# Altium PCB 3_IIP_QuadUART.PcbDoc (part 2 of 2)
Units mm, origin at the board's own origin, x right, y up, seen from the top; angles counter-clockwise.
Board outline 82.5 x 28 mm, 2 copper layers (Top Layer, Bottom Layer), stack 1.571 mm thick; 58 components, 30 nets, 183 pads, 28 vias.
Unrouted connection lines stored in the file: 1.
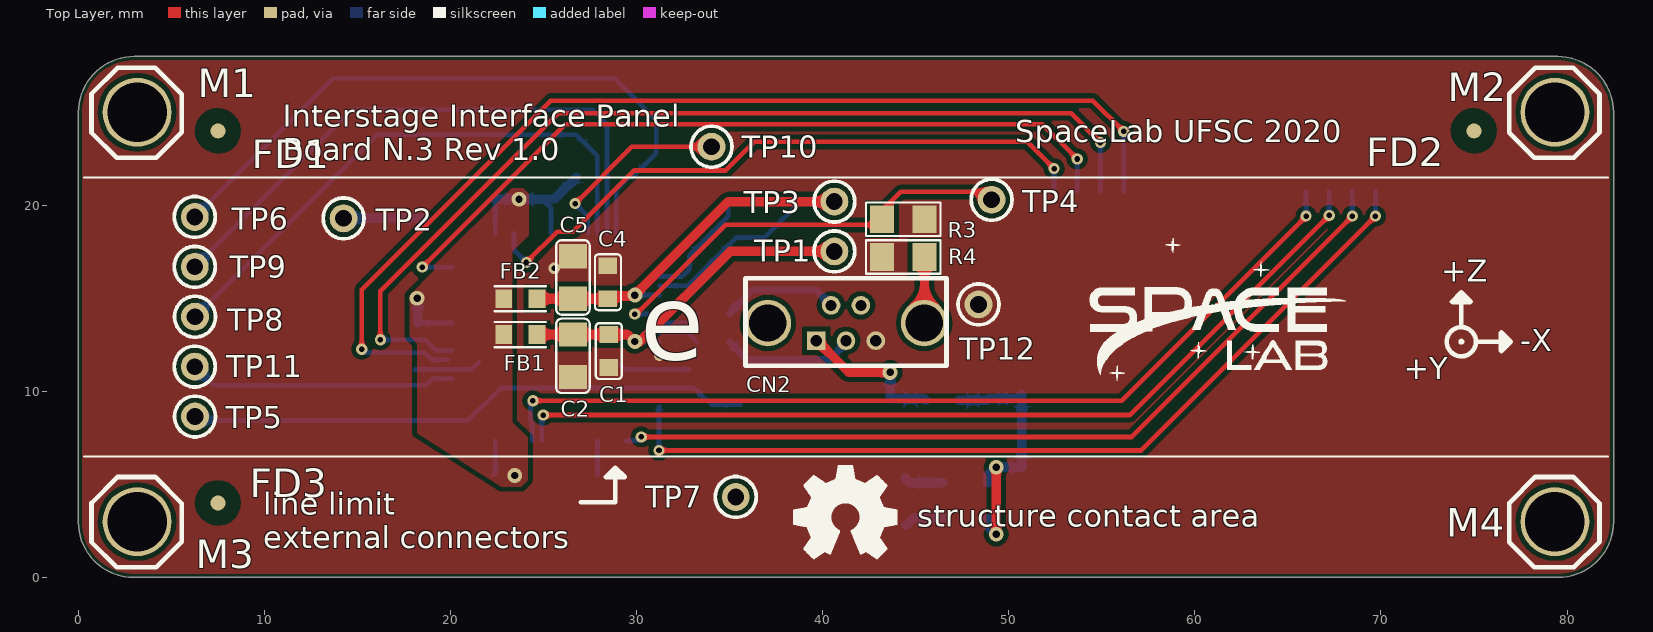
[diagram p0: Top Layer view]

## Polygon pours and split planes (outlines as drawn) (continued)
GND on Bottom Layer "Bottom_Layer-GND" (solid, remove dead copper, pour order 26): 0,25 cw(c3,25) 3,28 79.452,28 cw(c79.452,24.952) 82.5,24.952 82.5,3.048 cw(c79.452,3.048) 79.452,0 3.048,0 cw(c3.048,3.048) 0,3.048
3.3V on Top Layer "3.3V_TOP" (solid, pour order 6): 17.801,15.176 19.125,16.5 19.125,17.363 22.704,20.929 23.893,20.929 24.194,20.628 24.194,20.04 24.195,18.395 23.3,17.5 23.3,8.35 24.138,7.537 24.15,7.525 24.146,5.229 23.797,4.88 22.729,4.886 18.2,7.754 18.2,12.57 17.801,12.969
GND on Top Layer "Top_Layer-GND" (solid, remove dead copper, pour order 18): 0,25 cw(c3,25) 3,28 79.452,28 cw(c79.452,24.952) 82.5,24.952 82.5,3.048 cw(c79.452,3.048) 79.452,0 3.048,0 cw(c3.048,3.048) 0,3.048

## Silkscreen, mask and mechanical layers (free items; w line width, h text height)
Top Overlay:
  drawing of 1045 lines, arcs and shapes, not listed
  text "SpaceLab UFSC 2020" at 50.35,23.392 h1.2
  text "Interstage Interface Panel  / Board N.3 Rev 1.0" at 10.983,22.425 h1.2
  text "+Z" at 73.23,15.895 h1.2
  text "-X" at 77.48,12.145 h1.2
  text "+Y" at 71.23,10.645 h1.2
  text "e" at 30.2,10.35 h7
  text "structure contact area" at 45.071,2.724 h1.2
  text "line limit  / external connectors" at 9.925,1.575 h1.2
Bottom Overlay:
  circle w0.254: c74.325,12.65 r0.035
  circle w0.254: c74.325,12.65 r0.785
  region: 76.35,13.15 76.85,12.65 76.35,12.15
  region: 73.825,14.675 74.325,15.175 74.825,14.675
  lines w0.254: 73.825,14.8 74.325,15.3 ; 74.325,13.435 74.325,15.3 ; 74.825,14.8 74.325,15.3 ; 75.11,12.65 76.975,12.65 ; 76.475,12.15 76.975,12.65 ; 76.475,13.15 76.975,12.65
  text "Tx2" at 67.55,18.925 h0.8 r90
  text "GND" at 51.6,18.9 h0.8 r90
  text "Rx4" at 52.825,18.9 h0.8 r90
  text "Tx4" at 54.1,18.9 h0.8 r90
  text "Rx3" at 55.4,18.9 h0.8 r90
  text "Tx3" at 56.675,18.9 h0.8 r90
  text "Tx1" at 70.125,18.9 h0.8 r90
  text "Rx2" at 66.275,18.85 h0.8 r90
  text "Rx1" at 68.85,18.85 h0.8 r90
  text "GND" at 65,18.825 h0.8 r90
  text "UART  / Board / N.2" at 47.789,16.1 h0.8
  text "UART  / Board / N.1" at 62.2,16.1 h0.8
  text "+Z" at 73.235,15.875 h1.2
  text "-X" at 77.485,12.125 h1.2
  text "-Y" at 71.235,10.625 h1.2
  text "SpaceLab UFSC 2020" at 73.65,2.225 h1.2
Board edge:
  lines w0.2: 0,2.962 ccw(c2.962,2.962) 2.962,0 79.515,0 ccw(c79.515,2.985) 82.5,2.985 82.5,24.998 ccw(c79.498,24.998) 79.498,28 3.225,28 2.995,28 ccw(c2.995,25.005) 0,25.005 0,23.5 0,6.5 0,2.962
Dimensions:
  circle w0.2: c3.15,3 r1.6
  circle w0.2: c3.15,25 r1.6
  circle w0.2: c79.35,25 r1.6
  circle w0.2: c79.35,3 r1.6
  region: 39.664,5.221 40.164,5.721 40.664,5.221
  lines w0.2: 0.314,6.484 82.214,6.484 ; 0.314,21.484 82.214,21.484
  lines w0.254: 38.299,3.981 40.164,3.981 40.164,5.846 ; 39.664,5.346 40.164,5.846 ; 40.664,5.346 40.164,5.846
  text "structure contact area" at 26.389,23.534 h1.2
  text "external connectors area" at 25.139,13.334 h1.2
  text "(cm)" at 15.725,3.375 h1
  text "structure contact area" at 45.086,2.708 h1.2
  text "line limit  / external connectors" at 21.364,1.409 h1.2
Bottom ASM:
  text "R1" at 35.425,13.975 h0.5
  text "R2" at 35.399,12.426 h0.5
Sheet:
  lines w0.254: 0.427,-25.273 0.427,-5.161 138.649,-5.161 ; 0.502,-20.771 87.777,-20.771 ; 0.502,-16.009 138.649,-16.009 ; 0.552,-11.246 138.542,-11.246 ; 41.812,-25.198 41.812,-11.246 ; 87.849,-25.173 87.849,-5.211 ; 87.902,-11.161 87.902,-5.161 ; 105.374,-11.146 105.374,-5.148 ; 138.727,-25.273 -25.273,-25.273 -25.273,90.564 138.727,90.564 138.727,-25.183
  lines w0.381: -3.952,37.254 6.459,37.254 30.075,37.254 51.913,37.254 68.419,37.254 82.893,37.254 ; -3.952,40.302 6.459,40.302 30.075,40.302 51.913,40.302 68.419,40.302 82.893,40.302 ; -3.952,43.35 6.459,43.35 30.075,43.35 51.913,43.35 68.419,43.35 82.893,43.35 ; -3.952,46.398 6.459,46.398 30.075,46.398 51.913,46.398 68.419,46.398 82.893,46.398 ; -3.952,49.446 6.459,49.446 30.075,49.446 51.913,49.446 68.419,49.446 82.893,49.446 ; -3.952,52.494 6.459,52.494 30.075,52.494 51.913,52.494 68.419,52.494 82.893,52.494 ; -3.952,55.542 82.893,55.542 ; 6.459,58.59 6.459,34.206 ; 30.075,58.59 30.075,34.206 ; 51.913,58.59 51.913,34.206 ; 68.419,58.59 68.419,34.206 ; 6.459,34.206 -3.952,34.206 -3.952,58.59 82.893,58.59 82.893,34.206 68.419,34.206 ; 6.459,34.206 30.075,34.206 ; 30.075,34.206 51.913,34.206 ; 51.913,34.206 68.419,34.206
  text "Layer" at -2.174,56.304 h1.52
  text "Name" at 8.237,56.304 h1.52
  text "Material" at 31.853,56.304 h1.52
  text "Thickness" at 53.691,56.304 h1.52
  text "Constant" at 70.197,56.304 h1.52
  text "Top Overlay" at 8.237,53.256 h1.52
  text "Top Solder" at 8.237,50.208 h1.52
  text "Solder Resist" at 31.853,50.208 h1.52
  text "0,40mil" at 53.691,50.208 h1.52
  text "3,8" at 70.197,50.208 h1.52
  text "1" at -2.174,47.16 h1.52
  text "Top Layer" at 8.237,47.16 h1.52
  text "Copper" at 31.853,47.16 h1.52
  text "1,40mil" at 53.691,47.16 h1.52
  text "Dielectric 1" at 8.237,44.112 h1.52
  text "FR-4" at 31.853,44.112 h1.52
  text "59,06mil" at 53.691,44.112 h1.52
  text "4,5" at 70.197,44.112 h1.52
  text "2" at -2.174,41.064 h1.52
  text "Bottom Layer" at 8.237,41.064 h1.52
  text "Copper" at 31.853,41.064 h1.52
  text "1,40mil" at 53.691,41.064 h1.52
  text "Bottom Solder" at 8.237,38.016 h1.52
  text "Solder Resist" at 31.853,38.016 h1.52
  text "0,40mil" at 53.691,38.016 h1.52
  text "3,8" at 70.197,38.016 h1.52
  text "Bottom Overlay" at 8.237,34.968 h1.52
  text "DATE:" at 107.527,-9.248 h1.92
  text "1.0" at 99.302,-9.323 h1.92
  text "15/07/2020" at 118.252,-9.323 h1.92
  text "REV:" at 90.052,-9.561 h2.41
  text "TITLE: SEMI USB N.3 BOARD" at 2.527,-9.736 h2.54
  text "Silkscreen color: white" at 43.052,-14.498 h1.92
  text "MATERIAL:" at 2.367,-14.646 h1.92
  text "FR4" at 19.194,-14.646 h1.92
  text "Project: IIP FloripaSat-2" at 89.827,-14.673 h1.92
  text "Space Technology Research Laboraty" at 89.002,-18.273 h1.45
  text "Board Thickness:" at 2.042,-19.409 h1.92
  text "Layers: 02" at 43.252,-19.423 h1.92
  text "1.6mm" at 31.927,-19.498 h1.92
  text "Federal University of Santa Catarina" at 89.152,-21.023 h1.4
  text "SpaceLab UFSC" at 89.127,-23.898 h1.4
  text "Drawing:" at 43.502,-23.948 h1.92
  text "Yan C. de Azeredo" at 58.702,-23.948 h1.73
  text "PCB Surface:" at 1.852,-24.323 h1.92
  text "HASL" at 24.677,-24.448 h1.73
Drill Drawing:
  circle w0.254: c-20.055,72.563 r0.722
  lines w0.254: -20.777,65.34 -19.333,65.34 -19.333,66.785 -20.777,66.785 -20.777,65.34 ; -20.777,70.035 -19.333,70.035 -20.055,68.59 -20.777,70.035 ; -20.777,75.452 -20.416,75.452 -20.055,75.09 -19.694,75.452 -19.333,75.452 -19.694,75.813 -19.333,76.174 -19.694,76.174 -20.055,76.535 -20.416,76.174 -20.777,76.174 -20.416,75.813 -20.777,75.452 ; -20.777,78.702 -20.416,78.702 -20.416,78.34 -19.694,78.34 -19.694,78.702 -19.333,78.702 -19.333,79.424 -19.694,79.424 -19.694,79.785 -20.416,79.785 -20.416,79.424 -20.777,79.424 -20.777,78.702 ; -20.777,81.59 -20.055,81.952 -19.333,81.59 -19.694,82.313 -19.333,83.035 -20.055,82.674 -20.777,83.035 -20.416,82.313 -20.777,81.59
  lines w0.381: -22.084,64.365 130.958,64.365 ; -22.084,83.865 130.958,83.865 ; -10.029,61.115 -10.029,87.115 ; 1.526,61.115 1.526,87.115 ; 26.943,61.115 26.943,87.115 ; 38.023,61.115 38.023,87.115 ; 54.042,61.115 54.042,87.115 ; 86.606,61.115 86.606,87.115 ; 99.506,61.115 99.506,87.115 ; 115.784,61.115 115.784,87.115 ; -22.084,61.115 130.958,61.115 130.958,87.115 -22.084,87.115 -22.084,61.115
  text "Symbol" at -20.135,84.84 h1.56
  text "Count" at -9.054,84.84 h1.56
  text "Hole Size" at 2.501,84.84 h1.56
  text "Plated" at 27.918,84.84 h1.56
  text "Hole Type" at 38.998,84.84 h1.56
  text "Drill Layer Pair" at 55.017,84.84 h1.56
  text "Via/Pad" at 87.581,84.84 h1.56
  text "Pad Shape" at 100.481,84.84 h1.56
  text "Template" at 116.759,84.84 h1.56
  text "20" at -9.054,81.59 h1.3
  text "0,300mm (11,81mil)" at 2.501,81.59 h1.3
  text "PTH" at 27.918,81.59 h1.3
  text "Round" at 38.998,81.59 h1.3
  text "Top Layer - Bottom Layer" at 55.017,81.59 h1.3
  text "Via" at 87.581,81.59 h1.3
  text "Rounded" at 100.481,81.59 h1.3
  text "v60h30" at 116.759,81.59 h1.3
  text "8" at -9.054,78.34 h1.3
  text "0,400mm (15,75mil)" at 2.501,78.34 h1.3
  text "PTH" at 27.918,78.34 h1.3
  text "Round" at 38.998,78.34 h1.3
  text "Top Layer - Bottom Layer" at 55.017,78.34 h1.3
  text "Via" at 87.581,78.34 h1.3
  text "Rounded" at 100.481,78.34 h1.3
  text "v80h40" at 116.759,78.34 h1.3
  text "5" at -9.054,75.09 h1.3
  text "0,600mm (23,62mil)" at 2.501,75.09 h1.3
  text "PTH" at 27.918,75.09 h1.3
  text "Round" at 38.998,75.09 h1.3
  text "Top Layer - Bottom Layer" at 55.017,75.09 h1.3
  text "Pad" at 87.581,75.09 h1.3
  text "(Mixed)" at 100.481,75.09 h1.3
  text "(Mixed)" at 116.759,75.09 h1.3
  text "12" at -9.054,71.84 h1.3
  text "0,900mm (35,43mil)" at 2.501,71.84 h1.3
  text "PTH" at 27.918,71.84 h1.3
  text "Round" at 38.998,71.84 h1.3
  text "Top Layer - Bottom Layer" at 55.017,71.84 h1.3
  text "Pad" at 87.581,71.84 h1.3
  text "Rounded" at 100.481,71.84 h1.3
  text "c150h90" at 116.759,71.84 h1.3
  text "2" at -9.054,68.59 h1.3
  text "2,000mm (78,74mil)" at 2.501,68.59 h1.3
  text "PTH" at 27.918,68.59 h1.3
  text "Round" at 38.998,68.59 h1.3
  text "Top Layer - Bottom Layer" at 55.017,68.59 h1.3
  text "Pad" at 87.581,68.59 h1.3
  text "Rounded" at 100.481,68.59 h1.3
  text "c250h200" at 116.759,68.59 h1.3
  text "4" at -9.054,65.34 h1.3
  text "3,200mm (125,98mil)" at 2.501,65.34 h1.3
  text "PTH" at 27.918,65.34 h1.3
  text "Round" at 38.998,65.34 h1.3
  text "Top Layer - Bottom Layer" at 55.017,65.34 h1.3
  text "Pad" at 87.581,65.34 h1.3
  text "Rounded" at 100.481,65.34 h1.3
  text "c370h320" at 116.759,65.34 h1.3
  text "51 Total" at -9.054,62.09 h1.3

## Dimensions
2.882,27.982 to 2.882,21.482 on Dimensions
3.15,3 to 20.875,3.15 on Dimensions
0,0 to 0,28 on Dimensions
0,28 to 82.5,28 on Dimensions
3.15,3 to 79.35,3 on Dimensions
82.2,21.5 to 82.2,6.5 on Dimensions
82.2,6.5 to 82.5,0 on Dimensions

## Text inside footprints (layer, text, board x,y; h text height)
CN1: Bottom Overlay "1" at 63.175,20.25 h1 r180
CN3: Bottom Overlay "1" at 49.65,20.25 h1 r180